# Altium PCB RF_Shield.PcbDoc
Units mm, origin at the board's own origin, x right, y up, seen from the top; angles counter-clockwise.
Board outline 46 x 36.65 mm, 2 copper layers (Top Layer, Bottom Layer); 42 components, 29 nets, 158 pads, 167 vias.
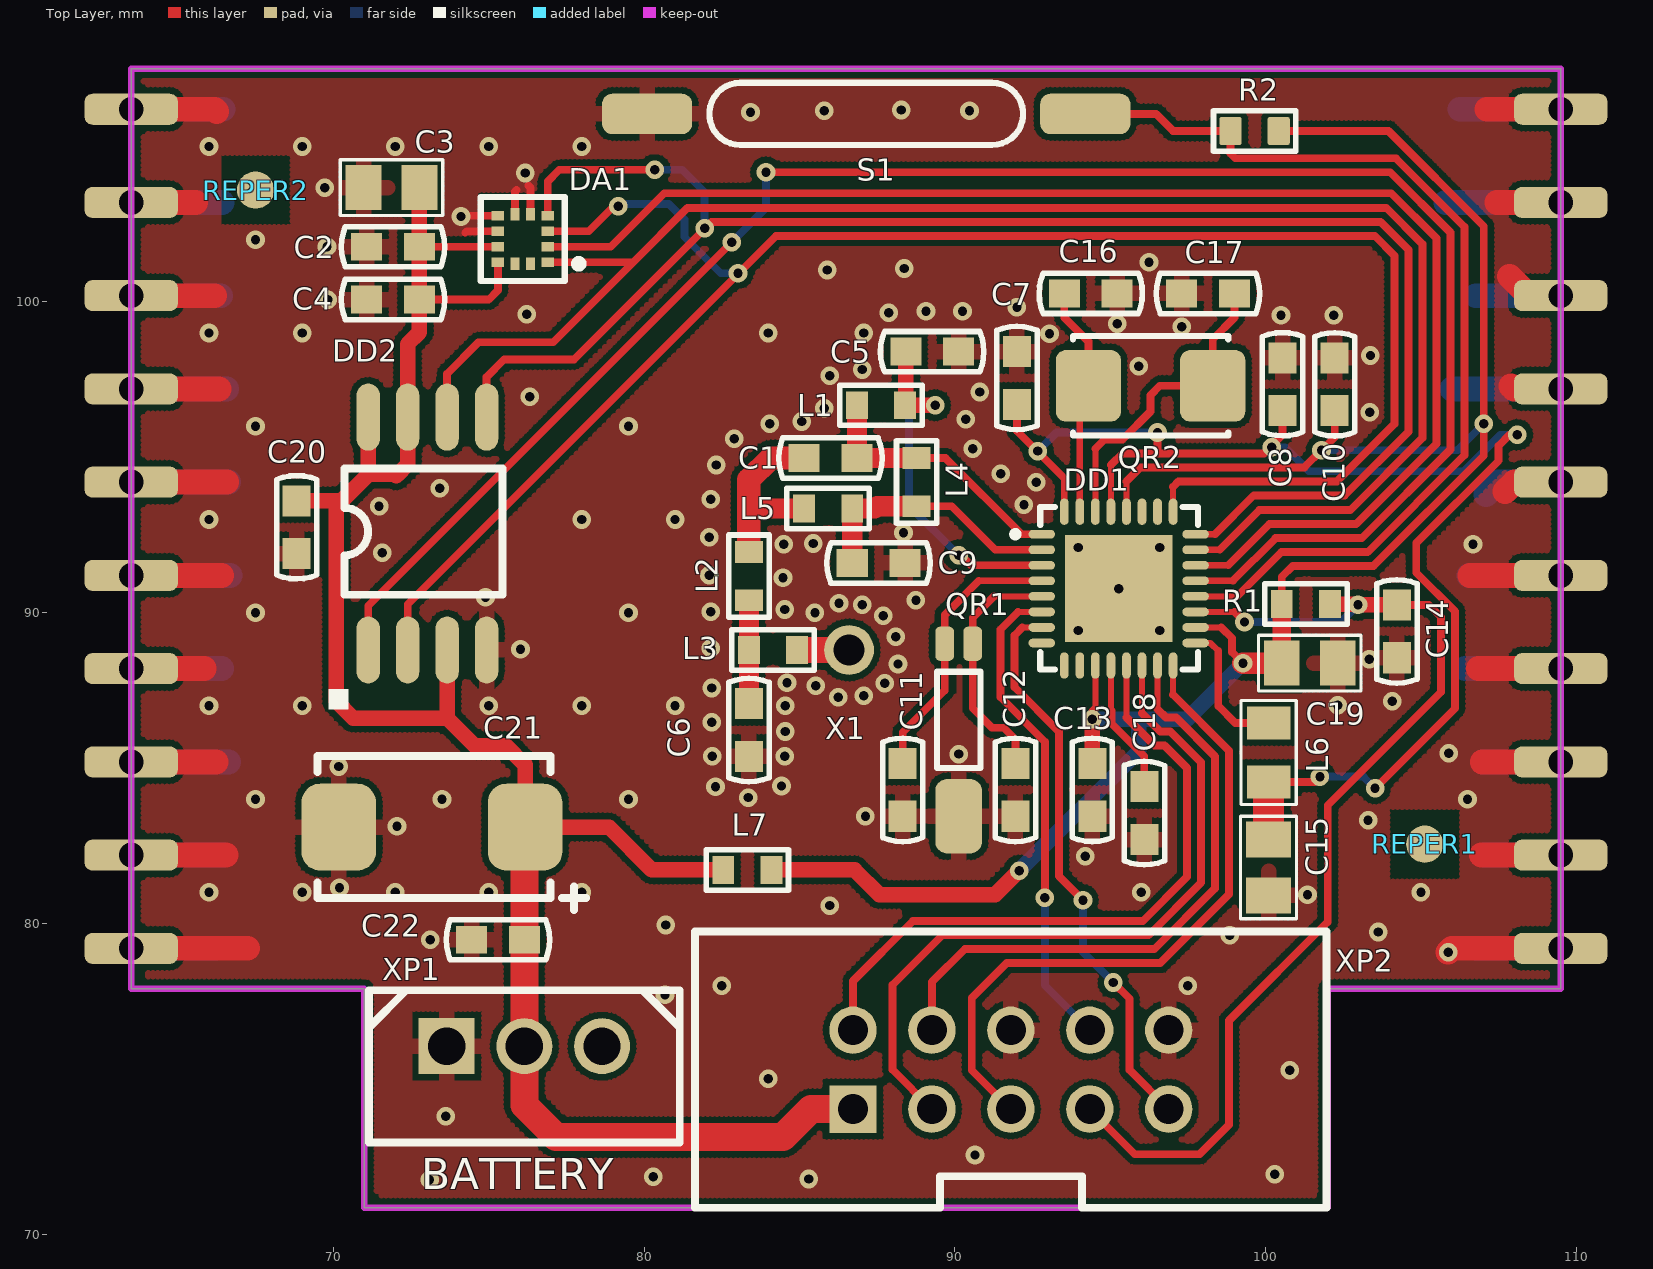
[diagram p0: Top Layer view]
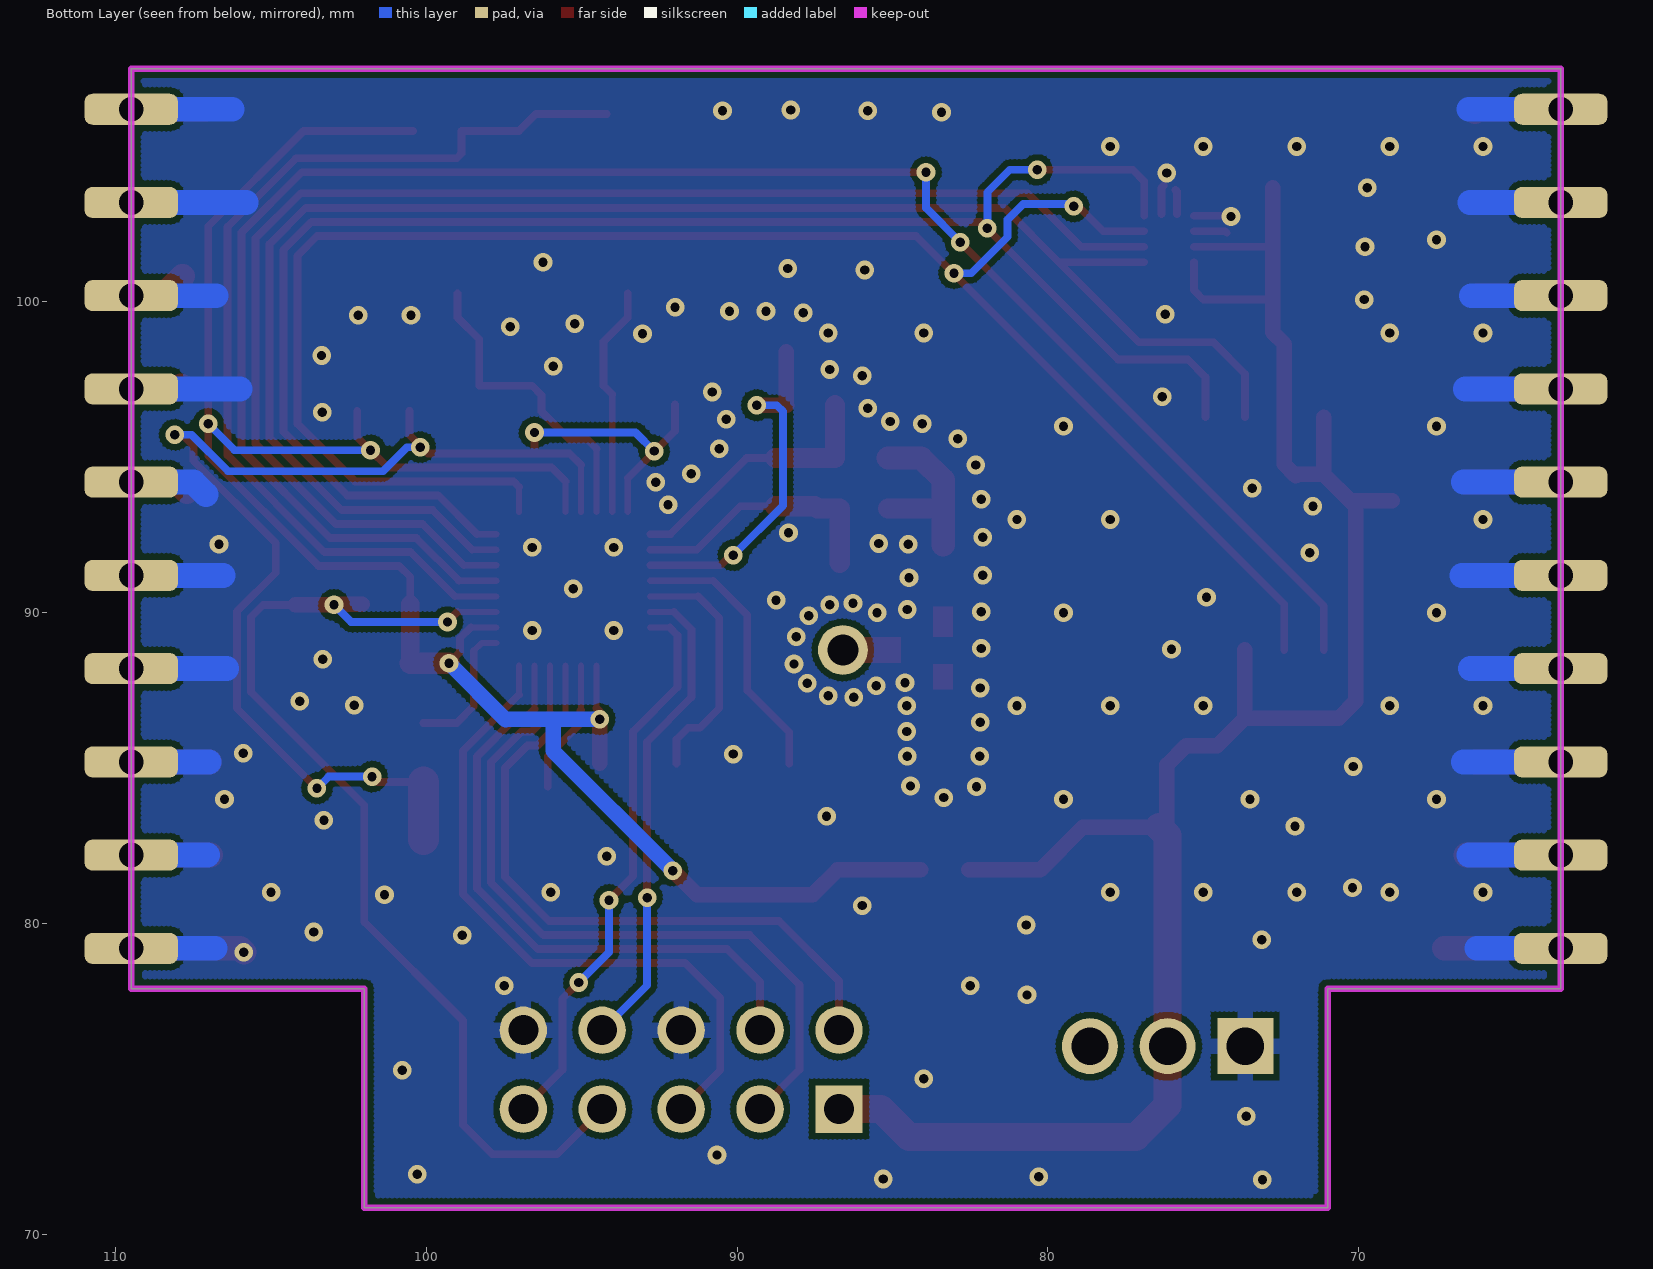
[diagram p1: Bottom Layer view, seen from below]

## Layer stack, top to bottom
Top Solder: solder mask 0.0102, Solder Resist, Dk 3.5
Top Layer: signal copper 0.0356
Dielectric 1: dielectric 0.32, FR-4, Dk 4.8
Bottom Layer: signal copper 0.0356
Bottom Solder: solder mask 0.0102, Solder Resist, Dk 3.5

## Board outline
63.5,77.9 71,77.9 71,70.85 102,70.85 102,77.9 109.5,77.9 109.5,107.5 63.5,107.5

## Design rules (kind name [scope] priority, off if disabled: settings)
Clearance [All] p1: gap=0.2
ComponentClearance [All] p1: gap=0.2 collisioncheckmode=3 verticalgap=2540 showdistances=FALSE
PolygonConnect PolygonConnect_1 [IsVia] p1: connectstyle=Direct reliefconductorwidth=0.254 reliefentries=4 polygonreliefangle="90 Angle" airgapwidth=0.254
PolygonConnect [All] p2: connectstyle=Relief reliefconductorwidth=0.5 reliefentries=4 polygonreliefangle="90 Angle" airgapwidth=0.2
RoutingVias [All] p1: holewidth=0.4 width=0.8 viastyle="Through Hole" minholewidth=0.3 minwidth=0.6 maxholewidth=0.5 maxwidth=1
SolderMaskExpansion [All] p1: expansion=0.102
Width [All] p1: maxlimit=3 minlimit=0.2 preferedwidth=0.5
29 further rules are at their usual default settings.

## Components (designator, comment, footprint, x,y, rotation, side; value= is the part's Value field where it differs from the comment)
C1 "1pF" CC0603 86,94.975 r0 top
C2 "0.1uF" CC0603 71.925,101.775 r180 top
C3 "10uF 6.3V" CC0805 71.875,103.675 r0 top
C4 "0.1uF" CC0603 71.925,100.075 r180 top
C5 "6.8pF" CC0603 89.275,98.4 r180 top
C6 "1pF" CC0603 83.375,86.225 r270 top
C7 "0.1uF" CC0603 92,97.55 r90 top
C8 "0.1uF" CC0603 100.55,97.35 r90 top
C9 "1pF" CC0603 87.55,91.6 r0 top
C10 "0.1uF" CC0603 102.225,97.35 r270 top
C11 "12pF" CC0603 88.325,84.3 r270 top
C12 "12pF" CC0603 91.95,84.3 r270 top
C13 "0.1uF" CC0603 94.425,84.3 r90 top
C14 "100pF" CC0603 104.225,89.4 r270 top
C15 "10uF" CC0805 100.1,81.8 r90 top
C16 "22pF" CC0603 94.375,100.275 r0 top
C17 "22pF" CC0603 98.15,100.275 r180 top
C18 "1uF" CC0603 96.1,83.55 r270 top
C19 "10uF" CC0805 101.425,88.375 r180 top
C20 "0.1uF" CC0603 68.825,92.75 r270 top
C21 "470uFx6.3V" TAJ-D-1M 73.175,83.1 r180 top
C22 "0.1uF" CC0603 75.3,79.475 r0 top
DA1 "LIS2DH12" LGA-12 76.1,102.025 r180 top
DD1 "CC2650" QFN32_TI 92.8,92.525 r0 top
DD2 "M25PE16" EIAJ_SO8 71.125,88.8 r90 top
L1 "2.4nH" L0603 88.4,96.675 r180 top
L2 "122nH" L0603 83.375,91.95 r270 top
L3 "2nH" L0603 83.375,88.8 r0 top
L4 "6.2nH" L0603 88.775,93.425 r90 top
L5 "2.7nH" L0603 86.7,93.35 r180 top
L6 "10uH" RC0805 100.1,85.5 r270 top
L7 "L0603" L0603 82.55,81.725 r0 top
QR1 "MS3V-T1R" MS3V-T1R 90.575,89 r270 top
QR2 "SJK-6L-24.0" AC5032_2 96.3,97.3 r0 top
R1 "100k" RC0603 101.3,90.275 r180 top
R2 "10k" RC0603-3M 99.65,105.5 r0 top
REPER1 "REPER1.2" REPER1.2 105.125,82.55 r90 top
REPER2 "REPER1.2" REPER1.2 67.5,103.6 r90 top
S1 "MDSM-10R 20-25AT" MDSM-10R 94.2,106.05 r180 top
X1 "PIN_1mm" PIN_1mm 86.6,88.8 r0 top
XP1 "MW03D" MW03D 73.65,76.05 r0 top
XP2 "BH-10" BH-10 86.725,74.025 r0 top

## Footprints (in the part's own frame and the unit in brackets; to place one, negate y for a bottom-side part, rotate by r counter-clockwise, add the part's x,y. Pads: shape width x height; smd on the part's side, far side on the other; paste and mask are expansions set on the pad)
AC5032_2 [mm]
  rrect30% 2.1x2.3 smd: 1(-2,0) 2(2,0)
  silkscreen extent -2.5,-1.6 2.5,1.6
BH-10 [mil]
  rect 60x60 hole 38: 1(0,0)
  round 60 hole 38: 2(0,100) 3(100,0) 4(100,100) 5(200,0) 6(200,100) 7(300,0) 8(300,100) 9(400,0) 10(400,100)
  silkscreen extent -200,-125 600,225
CC0603 [mm]
  rect 1x0.9 smd paste-25.4: 1(-0.85,0) 2(0.85,0)
  silkscreen extent -1.66,-0.65 1.66,0.65
CC0805 [mm]
  rect 1.15x1.45 smd paste-25.4: 1(-0.9,0) 2(0.9,0)
  silkscreen extent -1.65,-0.9 1.65,0.9
EIAJ_SO8 [mil]
  oval 85x29.53 smd: 1(0,0) 2(0,-50) 3(0,-100) 4(0,-150) 5(295,-150) 6(295,-100) 7(295,-50) 8(295,0)
  silkscreen extent -75,-170 230,50
L0603 [mm]
  rect 0.7x0.9 smd paste-25.4: 1(0,0) 2(1.549,0)
  silkscreen extent -0.55,-0.65 2.1,0.65
LGA-12 [mm]
  rect 0.4x0.3 smd mask+0.05: 1(-0.8,0.75) 2(-0.8,0.25) 3(-0.8,-0.25) 4(-0.8,-0.75) 7(0.8,-0.75) 8(0.8,-0.25) 9(0.8,0.25) 10(0.8,0.75)
  rect 0.3x0.4 smd mask+0.05: 5(-0.25,-0.8) 6(0.25,-0.8) 11(0.25,0.8) 12(-0.25,0.8)
  silkscreen extent -1.92,-1.35 1.35,1.35
MDSM-10R [mm]
  rrect50% 2.9x1.3 smd: 1(0,0) 2(14.1,0)
  silkscreen extent 2,-1 12.1,1
MS3V-T1R [mm]
  rrect50% 1.1x0.6 smd: 1(0,0) 2(0,-0.9)
  rrect50% 2.4x1.5 smd: 3(5.55,-0.45)
  silkscreen extent 0.9,-1.15 4,0.25
MW03D [mm]
  rect 1.8x1.8 hole 1.2: 1(0,0)
  round 1.8 hole 1.2: 2(2.5,0) 3(5,0)
  silkscreen extent -2.5,-3.1 7.5,1.8
PIN_1mm [mm]
  round 1.6 hole 1: 1(0,0)
QFN32_TI [mm]
  oval 0.85x0.28 smd mask+0.05: 1(0,0) 2(0,-0.5) 3(0,-1) 4(0,-1.5) 5(0,-2) 6(0,-2.5) 7(0,-3) 8(0,-3.5) 17(4.95,-3.5) 18(4.95,-3) 19(4.95,-2.5) 20(4.95,-2) 21(4.95,-1.5) 22(4.95,-1) 23(4.95,-0.5) 24(4.95,0)
  oval 0.28x0.85 smd mask+0.05: 9(0.725,-4.225) 10(1.225,-4.225) 11(1.725,-4.225) 12(2.225,-4.225) 13(2.725,-4.225) 14(3.225,-4.225) 15(3.725,-4.225) 16(4.225,-4.225) 25(4.225,0.725) 26(3.725,0.725) 27(3.225,0.725) 28(2.725,0.725) 29(2.225,0.725) 30(1.725,0.725) 31(1.225,0.725) 32(0.725,0.725)
  rect 3.45x3.45 smd mask+0.05: 33(2.475,-1.75)
  silkscreen extent -0.95,-4.35 5.02,0.87
RC0603 [mm]
  rect 0.7x0.9 smd paste-25.4: 1(-0.775,0) 2(0.774,0)
  silkscreen extent -1.32,-0.65 1.33,0.65
RC0603-3M [mm]
  rrect20% 0.71x0.91 smd paste-25.4: 1(-0.775,0) 2(0.775,0)
  silkscreen extent -1.32,-0.65 1.33,0.65
RC0805 [mm]
  rect 1.05x1.4 smd paste-25.4: 1(-0.95,0) 2(0.95,0)
  silkscreen extent -1.67,-0.89 1.67,0.89
REPER1.2 [mm]
  round 1.2 smd paste-25.4 mask-25.4: 1(0,0)
  Top Layer pour cut-out: -1.2,-1.2 1.2,-1.2 1.2,1.2 -1.2,1.2
TAJ-D-1M [mm]
  rrect50% 2.4x2.8 smd: 1(-2.997,0) 2(2.997,0)
  silkscreen extent -4.95,-2.29 3.68,2.67

## Part data
C1 C2 C4 C5 C6 C7 C8 C9 C10 C11 C12 C13 C14 C16 C17 C18 C20 C22: library part CC0603, "CC0603"
C3 C15 C19: library part CC0805, "CC0805"
C21: library part TAJ-D, "TAJ-D"
DD1: library part CC2650RHB, "CC2650RHBT"
DD2: library part S25FL016A0LMFI01, "S25FL016A0LMFI01"
L1 L2 L3 L4 L5: library part L0603, "L0603"
L6: library part L0805, "L0805"
QR1: "CRYSTAL_32768 Hz"
QR2: library part AC5032_2, "AC5032/2"
R1 R2: library part RC0603, "RC0603"
S1: library part MDSM-10R, "Switch, Single Pole, Single Throw, Normally Open"

## Free pads (board coordinates)
  rrect50% 3x1 hole 0.8: 0(63.5,79.2) 0(63.5,82.2) 0(63.5,85.2) 0(63.5,88.2) 0(63.5,91.2) 0(63.5,94.2) 0(63.5,97.2) 0(63.5,100.2) 0(63.5,103.2) 0(63.5,106.2) 0(109.5,79.2) 0(109.5,82.2) 0(109.5,85.2) 0(109.5,88.2) 0(109.5,91.2) 0(109.5,94.2) 0(109.5,97.2) 0(109.5,100.2) 0(109.5,103.2) 0(109.5,106.2)

## Via types
v1: diameter 0.6, hole 0.3, Top Layer to Bottom Layer, 167 vias

## Nets (pads, with @x,y where several pads share a name; then routed paths per layer and width w, separated by ;. In a path a pad name is that pad's centre, name@x,y a point inside that pad or via, vN(x,y) a via of type N, cw(c..) or ccw(c..) an arc to the next point about the centre after c; other vN are vias at no path point)
GND: C2.2 C3.1 C4.2 C5.1 C6.2 C7.2 C8.2 C9.2 C10.1 C11.2 C12.2 C13.1 C14.2 C15.1 C16.2 C17.2 C18.2 C19.1 C20.2 C21.2 C22.1 DA1.5 DA1.6 DA1.7 DA1.8 DD1.33 DD2.4 pad.0 QR1.3 S1.2 XP1.1 XP2.6 XP2.10 | length 115.7
  Top Layer w0.25: v1(74.113,102.75) 74.138,102.775 DA1.7 ; 74.25,102.225 74.3,102.275 DA1.8 ; DA1.6 75.85,103.55 75.9,103.6 ; 76.275,103.75 76.35,103.675 DA1.5
  Top Layer w0.8: pad.0@63.5,79.2 67.25,79.2 ; pad.0@63.5,82.2 66.55,82.2 ; pad.0@63.5,85.2 66.225,85.2 ; pad.0@63.5,88.2 65.85,88.2 ; pad.0@63.5,91.2 66.4,91.2 ; pad.0@63.5,94.2 66.575,94.2 ; pad.0@63.5,97.2 66.325,97.2 ; pad.0@63.5,100.2 66.175,100.2 ; pad.0@63.5,103.2 65.575,103.2 ; pad.0@63.5,106.2 66.175,106.2 66.25,106.125 ; v1(105.875,79.075) 106,79.2 pad.0@109.5,79.2 ; 106.575,91.2 pad.0@109.5,91.2 ; 106.85,88.2 pad.0@109.5,88.2 ; 106.95,82.2 pad.0@109.5,82.2 ; 106.975,85.2 pad.0@109.5,85.2 ; 107.125,106.2 pad.0@109.5,106.2 ; 107.45,103.2 pad.0@109.5,103.2 ; 107.702,93.9 108.002,94.2 pad.0@109.5,94.2 ; 107.85,100.827 108.477,100.2 pad.0@109.5,100.2 ; 107.9,97.3 108,97.2 pad.0@109.5,97.2
  Bottom Layer w0.8: pad.0@63.5,79.2 66.2,79.2 ; pad.0@63.5,82.2 66.45,82.2 ; pad.0@63.5,85.2 66.625,85.2 ; pad.0@63.5,88.2 66.4,88.2 ; pad.0@63.5,91.2 66.675,91.2 ; pad.0@63.5,94.2 66.625,94.2 ; pad.0@63.5,97.2 66.575,97.2 ; pad.0@63.5,100.2 66.375,100.2 ; pad.0@63.5,103.2 66.425,103.2 ; pad.0@63.5,106.2 66.45,106.2 ; 105.8,103.2 pad.0@109.5,103.2 ; 106,97.2 pad.0@109.5,97.2 ; 106.25,106.2 pad.0@109.5,106.2 ; 106.425,88.2 pad.0@109.5,88.2 ; 106.55,91.2 pad.0@109.5,91.2 ; 106.775,100.2 pad.0@109.5,100.2 ; 106.8,79.2 pad.0@109.5,79.2 ; 107,85.2 pad.0@109.5,85.2 ; 107.05,82.2 pad.0@109.5,82.2 ; 107.1,93.8 107.5,94.2 pad.0@109.5,94.2
  other v1: 73.1,71.75 85.3,71.775 80.3,71.85 100.3,71.925 90.65,72.55 73.625,73.8 84,75 100.775,75.275 80.675,77.7 82.5,78 97.5,78 73.125,79.475 98.85,79.625 103.625,79.725 80.7,79.95 85.975,80.575 101.35,80.925 66,81 69,81 72,81 75,81 78,81 96,81 105,81 70.2,81.15 94.2,82.16 72.05,83.125 103.3,83.325 87.125,83.45 67.5,84 73.5,84 79.5,84 106.5,84 83.35,84.05 82.3,84.4 84.425,84.425 70.175,85.05 82.2,85.375 84.525,85.375 90.125,85.45 105.9,85.475 84.55,86.175 82.175,86.475 66,87 69,87 75,87 78,87 81,87 84.55,87 102.325,87.025 104.075,87.15 86.25,87.275 87.075,87.325 82.175,87.575 85.525,87.65 87.75,87.725 84.6,87.75 88.175,88.35 103.337,88.5 76.025,88.825 82.15,88.85 88.1,89.225 93.975,89.425 96.6,89.425 87.7,89.9 67.5,90 79.5,90 85.5,90 82.15,90.025 84.525,90.1 87.025,90.25 86.275,90.3 88.75,90.4 74.9,90.5 95.275,90.775 84.475,91.125 82.1,91.2 71.575,91.925 93.975,92.1 96.6,92.1 84.5,92.2 106.675,92.2 85.45,92.225 82.1,92.425 88.35,92.575 66,93 78,93 81,93 71.475,93.425 92.225,93.475 82.15,93.65 73.425,94 92.625,94.2 91.475,94.475 82.325,94.75 90.575,95.275 82.9,95.6 67.5,96 79.5,96 84.05,96.075 85.075,96.15 90.35,96.225 103.35,96.45 85.8,96.575 76.325,96.95 90.8,97.1 85.975,97.625 87.025,97.825 95.925,97.925 103.375,98.275 93.05,98.975 66,99 69,99 84,99 87.075,99 97.3,99.2 95.225,99.3 100.5,99.575 102.2,99.575 76.225,99.6 87.875,99.65 89.075,99.7 90.25,99.7 92,99.825 69.825,100.075 85.9,101.025 88.375,101.075 96.25,101.275 69.8,101.775 67.5,102 69.725,103.675 76.175,104.15 66,105 69,105 72,105 75,105 78,105 83.425,106.1 85.8,106.15 90.475,106.15 88.275,106.175
JTAG_TCK: DD1.14 XP2.3 | length 23.8
  Top Layer w0.2: 96.025,86.761 DD1.14
  Top Layer w0.25: XP2.3 88,75.29 88,78.025 89.6,79.625 96.236,79.625 97.925,81.314 97.925,85.186 96.936,86.175 96.611,86.175 96.025,86.761
JTAG_TDI: DD1.16 XP2.5 | length 21.9
  Top Layer w0.2: 97.025,87.359 DD1.16
  Top Layer w0.25: XP2.5 90.55,75.28 90.55,77.6 91.675,78.725 96.609,78.725 98.825,80.941 98.825,85.559 97.025,87.359
JTAG_TDO: DD1.15 XP2.4 | length 20
  Top Layer w0.2: 96.525,86.898 DD1.15
  Top Layer w0.25: XP2.4 89.265,78.115 90.325,79.175 96.423,79.175 98.375,81.127 98.375,85.373 97.123,86.625 96.798,86.625 96.525,86.898
JTAG_TMS: DD1.13 XP2.2 | length 21.5
  Top Layer w0.2: 95.525,86.625 DD1.13
  Top Layer w0.25: XP2.2 86.725,78.15 88.65,80.075 96.05,80.075 97.475,81.5 97.475,85 96.75,85.725 96.425,85.725 95.525,86.625
MISO: DA1.3 DD1.25 DD2.2 | length 60.2
  Top Layer w0.2: DD1.25 97.025,94.05
  Top Layer w0.25: DD2.2 72.395,90.27 84.25,102.125 103.514,102.125 104.15,101.489 104.15,96.075 102.3,94.225 97.2,94.225 97.025,94.05 ; DA1.3 78.225,102.275 79.025,103.075 v1(79.175,103.075)
  Bottom Layer w0.25: v1@79.25,103.15 80.8,103.15 81.3,102.65 81.3,102.1 82.475,100.925 v1(83.025,100.925)
MOSI: DA1.4 DD1.24 DD2.5 | length 55.2
  Top Layer w0.2: DD1.24 98.375,92.525
  Top Layer w0.25: DD2.5 74.935,97.585 75.5,98.15 77.75,98.15 82.175,102.575 103.7,102.575 104.6,101.675 104.6,95.825 102.55,93.775 99.625,93.775 98.375,92.525 ; DA1.4 76.9,103.875 77.275,104.25 v1(80.35,104.25)
  Bottom Layer w0.25: v1(80.35,104.25) 81.225,104.25 81.95,103.525 v1(81.95,102.375)
NetC1_1: C1.1 L2.1 L5.2 | length 6
  Top Layer w0.65: 83.325,93.35 L5.2
  Top Layer w0.75: L2.1@83.375,92.175 83.375,94.275 84.075,94.975 C1.1
NetC6_1: C6.1 L2.2 L3.1
NetC7_1: C7.1 C8.1 C15.2 DD1.29 DD1.32 L6.2 | length 45.9
  Top Layer w0.2: DD1.32 93.525,94.325 ; DD1.29 95.025,94.75
  Top Layer w0.25: C7.1 92,95.85 93.525,94.325 ; 95.025,94.75 95.4,95.125 96.525,95.125 ; v1(96.525,95.8) 96.525,95.125 ; L6.2 101.575,84.55 v1(101.75,84.725) ; C8.1 100.55,95.725 99.95,95.125 96.525,95.125 ; v1(103.525,84.35) 106.1,86.925 106.1,90.036 104.85,91.286 104.85,92.243 107.5,94.893 107.5,95.375 107.85,95.725 v1(108.1,95.725)
  Top Layer w1: C15.2 L6.2
  Bottom Layer w0.25: v1(92.675,95.2) 93.275,95.8 v1(96.525,95.8) v1@96.7,95.8 ; v1(100.2,95.325) 100.625,95.325 101.4,94.55 106.384,94.55 107.559,95.725 v1(108.1,95.725) ; v1(101.75,84.725) 103.15,84.725 v1(103.525,84.35)
NetC11_1: C11.1 DD1.4 QR1.2 | length 8.9
  Top Layer w0.2: 90.775,91.025 DD1.4
  Top Layer w0.25: C11.1 88.325,86.15 89.675,87.5 QR1.2 89.675,89.925 90.775,91.025
NetC12_1: C12.1 DD1.5 QR1.1 | length 8
  Top Layer w0.2: 91.261,90.525 DD1.5
  Top Layer w0.25: 91.261,90.525 90.575,89.839 QR1.1 90.575,86.925 91.2,86.3 91.575,86.3 91.95,85.925 C12.1
NetC16_1: C16.1 DD1.31 QR2.1 | length 7.5
  Top Layer w0.2: DD1.31 QR2.1@94.025,97.025
  Top Layer w0.25: C16.1 93.525,99.5 94.3,98.725 QR2.1 QR2.1@94.025,97.025
NetC17_1: C17.1 DD1.30 QR2.2 | length 10.2
  Top Layer w0.2: DD1.30 94.525,95.275
  Top Layer w0.25: 94.525,95.275 94.825,95.575 95.4,95.575 96.3,96.475 96.3,97 96.6,97.3 QR2.2 98.3,98.8 99,99.5 C17.1
NetC18_1: C18.1 DD1.12 | length 4.3
  Top Layer w0.2: 95.025,86.859 DD1.12
  Top Layer w0.25: 95.025,86.859 95.05,86.834 95.05,86.425 96.1,85.375 C18.1
NetDD1_17: DD1.17 L6.1 | length 4.5
  Top Layer w0.2: DD1.17 98.225,89.025 98.475,88.775
  Top Layer w0.25: 98.475,88.775 98.475,87 99.025,86.45 L6.1
NetL3_2: L3.2 X1.1
RESET: C14.1 DD1.19 R1.1 XP2.7 | length 34
  Top Layer w0.2: DD1.19 99,90.025
  Top Layer w0.25: XP2.7 95.795,72.575 97.875,72.575 98.825,73.525 98.825,76.875 102,80.05 102,83.8 105.65,87.45 105.65,89.85 105.25,90.25 C14.1 ; 99,90.025 v1(99.325,89.7) ; R1.1 R1.1@102.1,90.25
  Top Layer w0.5: R1.1 102.95,90.275 v1(102.975,90.25) C14.1
  Bottom Layer w0.25: v1(99.325,89.7) 102.425,89.7 v1(102.975,90.25)
RF_N: C9.1 DD1.2 L4.1 L5.1 | length 8.5
  Top Layer w0.25: L4.1 89.9,93.425 91.3,92.025 DD1.2
  Top Layer w0.65: C9.1 L5.1 87.425,93.35 87.5,93.425 L4.1
RF_P: C1.2 DD1.1 L1.2 L4.2 | length 8.7
  Top Layer w0.25: L4.2 89.701,94.974 92.15,92.525 DD1.1
  Top Layer w0.65: L1.2 C1.2 L4.2@88.774,94.975
RF_RXD: DD1.7 XP2.9 | length 18.3
  Top Layer w0.2: 92.175,89.525 DD1.7
  Top Layer w0.25: 92.175,89.525 91.925,89.275 91.925,87.6 93.35,86.175 93.35,81.525 v1(94.125,80.75) ; v1(95.1,78.1) 95.625,77.575 95.625,75.285 XP2.9
  Bottom Layer w0.25: v1(94.125,80.75) 94.125,79.075 v1(95.1,78.1)
RF_TXD: DD1.6 XP2.8 | length 15.6
  Top Layer w0.2: 92.039,90.025 DD1.6
  Top Layer w0.25: 92.039,90.025 91.475,89.461 91.475,87.275 92.9,85.85 v1(92.9,80.825)
  Bottom Layer w0.25: v1(92.9,80.825) 92.9,78.01 XP2.8
RX_TX: C5.2 DD1.3 L1.1 | length 11.7
  Top Layer w0.25: v1@90.175,91.875 90.525,91.525 DD1.3
  Top Layer w0.5: L1.1 v1(89.375,96.675) ; L1.1@88.425,96.7 C5.2
  Bottom Layer w0.25: v1(89.375,96.675) 88.725,96.675 88.525,96.475 88.525,93.45 v1(90.125,91.85)
SCK: DA1.1 DD1.23 DD2.6 | length 53.3
  Top Layer w0.2: DD1.23 98.525,92.025
  Top Layer w0.25: DD2.6 73.665,97.69 74.675,98.7 77.075,98.7 79.65,101.275 ; DA1.1 79.65,101.275 ; 98.525,92.025 99.8,93.3 102.725,93.3 105.05,95.625 105.05,101.861 103.886,103.025 81.4,103.025 79.65,101.275
SS0: DA1.2 DD1.22 | length 45.9
  Top Layer w0.2: DD1.22 98.8,91.525
  Top Layer w0.25: DA1.2 78.925,101.775 80.65,103.5 104.048,103.5 105.5,102.048 105.5,95.439 102.911,92.85 100.125,92.85 98.8,91.525
SS1: DD1.21 DD2.1 | length 60.4
  Top Layer w0.2: DD1.21 98.95,91.025
  Top Layer w0.25: DD2.1 71.125,90.225 v1(82.825,101.925) ; v1(83.925,104.175) 104.009,104.175 105.95,102.234 105.95,95.252 103.098,92.4 100.325,92.4 98.95,91.025
  Bottom Layer w0.25: v1(82.825,101.925) 83.925,103.025 v1(83.925,104.175)
START: DD1.20 R2.1 S1.1 | length 32
  Top Layer w0.2: DD1.20 99.086,90.525
  Top Layer w0.25: S1.1 96.475,106.05 97.025,105.5 R2.1 98.875,104.775 99.025,104.625 104.196,104.625 106.4,102.421 106.4,95.066 103.284,91.95 100.511,91.95 99.086,90.525
VBAT: C2.1 C3.2 C4.1 C20.1 C21.1 C22.2 DA1.9 DA1.10 DD2.3 DD2.7 DD2.8 L7.1 XP1.2 XP2.1 | length 66
  Top Layer w0.25: C4.1 75,100.075 75.3,100.375 DA1.10 ; C2.1 DA1.9
  Top Layer w0.5: C20.1@68.925,93.6 70.275,93.6 ; DD2.8 71.125,94.45 ; 72.025,94.4 72.075,94.45 ; C3.2 C2.1 C4.1 72.775,99.025 72.395,98.645 DD2.7 72.395,94.77 72.075,94.45 ; DD2.3 73.665,86.61 ; L7.1 80.25,81.725 78.875,83.1 76.422,83.1 C21.1 76.172,85.103 75.55,85.725 74.55,85.725 73.665,86.61 ; 70.275,93.6 71.125,94.45 ; 70.275,93.6 70.1,93.425 70.1,87.15 70.64,86.61 73.665,86.61 ; 71.125,94.45 72.075,94.45
  Top Layer w0.9: C21.1@76.422,83.1 76.15,82.828 XP1.2 76.15,74.15 77.175,73.125 84.475,73.125 85.375,74.025 XP2.1
VBAT_F: C10.2 C13.2 C19.2 DD1.11 DD1.18 DD1.28 L7.2 R1.2 R2.2 | length 68.3
  Top Layer w0.2: 94.525,86.925 DD1.11 ; DD1.28 95.525,94.225 ; DD1.18 98.575,89.525
  Top Layer w0.25: v1(94.425,86.575) 94.425,86.825 94.525,86.925 ; 95.525,94.225 95.975,94.675 101.25,94.675 v1(101.8,95.225) 102.225,95.65 C10.2 ; 98.575,89.525 98.925,89.175 98.925,88.725 v1(99.275,88.375) ; R2.2 103.957,105.5 107.025,102.432 v1(107.025,96.075) 107.025,95.054 103.471,91.5 100.875,91.5 100.526,91.151 R1.2
  Top Layer w0.5: L7.2 86.775,81.725 87.575,80.925 91.3,80.925 v1(92.075,81.7) ; C13.2 v1(94.425,86.575)
  Top Layer w0.6: C19.2@100.526,88.376 R1.2
  Top Layer w0.7: v1(99.275,88.375) C19.2
  Bottom Layer w0.25: v1(101.8,95.225) 106.175,95.225 v1(107.025,96.075)
  Bottom Layer w0.5: v1(92.075,81.7) 95.925,85.55 95.925,86.575 ; v1(94.425,86.575) 95.925,86.575 ; v1(99.275,88.375) 97.45,86.55 97.425,86.575 95.925,86.575
pads on no net: DA1.11 DA1.12 DD1.8 DD1.9 DD1.10 DD1.26 DD1.27 REPER1.1 REPER2.1 XP1.3

## Polygon pours and split planes (outlines as drawn)
GND on Top Layer "GND_L01_P000" (hatched 90Degree grid 0.15 track 0.2, remove dead copper, pour order 0): 63.5,107.5 109.5,107.5 109.5,77.9 102,77.9 102,70.85 71,70.85 71,77.9 63.5,77.9
GND on Bottom Layer "GND_L02_P002" (hatched 90Degree grid 0.15 track 0.2, remove dead copper, pour order 2): 63.5,107.5 109.5,107.5 109.5,77.9 102,77.9 102,70.85 71,70.85 71,77.9 63.5,77.9

## Keep-outs
Keep-Out Layer:
  the board outline again, w0.2

## Other copper
Top Layer:
  rectangle net NetC6_1: 83.05,89.225 83.7,90.2
  rectangle net NetC6_1: 83.05,87.525 83.7,88.35
  rectangle net NetL3_2: 84.725,88.375 86.325,89.225
  pour cut-out: 86.875,97.425 88.375,97.425 88.375,96.025 86.875,96.025
  pour cut-out: 85.051,93.926 86.551,93.926 86.551,92.725 85.051,92.725
  pour cut-out: 85.175,95.576 86.675,95.576 86.675,94.375 85.175,94.375
  pour cut-out: 83.275,89.426 84.775,89.426 84.775,88.225 83.275,88.225
  pour cut-out: 82.625,91.65 84.125,91.65 84.125,90.75 82.625,90.75
  pour cut-out: 74.575,103.6 74.575,100.5 74.7,100.5 77.575,100.5 77.575,103.6

## Silkscreen, mask and mechanical layers (free items; w line width, h text height)
Top Overlay:
  text "BATTERY" at 72.825,71.45 h1
Mechanical 7:
  text "Перед монтажем платы антенны  / две платы необходимо совместить  / по отверстию X1. / При монтаже плату необходимо  / припаять к плате антенны через  / боковые контакты" at 113.95,94.45 h1
  text "С контакта Х1 (PLS-01) перед пайкой / необходимо снять пластиковый бортик. / После снятия контакт необходимо припаять  / заподлицо к плате антенны. С обратной / стороны контакт необходимо откусить бокорезами" at 112,85.15 h1